# EAGLE board Projeto PCB (EAGLE 9.6.2)
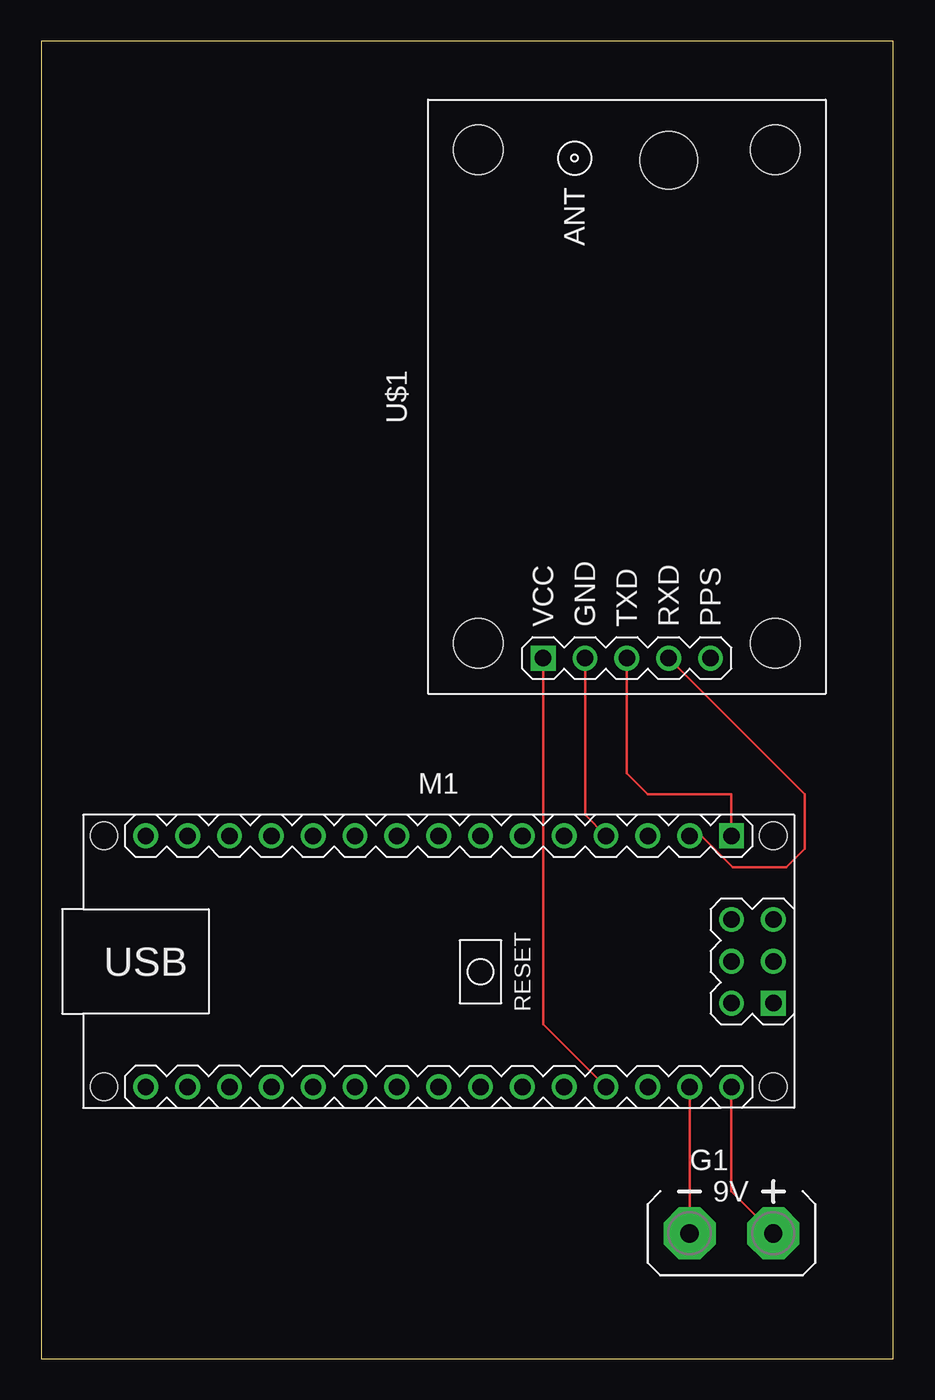
[diagram p0: board, top side]

Size 51.74 x 80 mm. Coordinates in mm from the lower left corner, seen from the top.
Outline: 0,0 51.74,0 51.74,80 0,80 0,0
Copper layers (1*16): Top 0.035mm / dielectric 1.5mm / Bottom 0.035mm
Design rules "default": minimum track width 6mil, minimum drill 0.35mm, track to track 6mil, track to pad 6mil, pad to pad 6mil, via to via 6mil, smd to smd 6mil, copper to edge 40mil, drill to drill 6mil, minimum pad ring 10mil, minimum via ring 8mil, stop-mask expansion 4mil, vias tented up to drill 0mil, thermal gap 10mil

## Footprints (pad centres in the part's own frame; a part is rotated, then mirrored left to right if it is on the bottom)
AB9V = drill 1.118 pad 3.15 octagon: + 0,2.54; - 0,-2.54
ARDUINO-NANO-3.0#ISP = drill 1 square: J1.1 17.78,7.62; J4.1 20.32,-2.54 | drill 1: J1.2 15.24,7.62; J1.3 12.7,7.62; J1.4 10.16,7.62; J1.5 7.62,7.62; J1.6 5.08,7.62; J1.7 2.54,7.62; J1.8 0,7.62; J1.9 -2.54,7.62; J1.10 -5.08,7.62; J1.11 -7.62,7.62; J1.12 -10.16,7.62; J1.13 -12.7,7.62; J1.14 -15.24,7.62; J1.15 -17.78,7.62; J2.1 17.78,-7.62; J2.2 15.24,-7.62; J2.3 12.7,-7.62; J2.4 10.16,-7.62; J2.5 7.62,-7.62; J2.6 5.08,-7.62; J2.7 2.54,-7.62; J2.8 0,-7.62; J2.9 -2.54,-7.62; J2.10 -5.08,-7.62; J2.11 -7.62,-7.62; J2.12 -10.16,-7.62; J2.13 -12.7,-7.62; J2.14 -15.24,-7.62; J2.15 -17.78,-7.62; J4.2 17.78,-2.54; J4.3 20.32,0; J4.4 17.78,0; J4.5 20.32,2.54; J4.6 17.78,2.54 | hole 1.651: -20.32,7.62; -20.32,-7.62; 20.32,-7.62; 20.32,7.62
GPS-RECEIVER-NEO6M = drill 1 square: 1 -15.875,5.08 | drill 1: 2 -15.875,2.54; 3 -15.875,0; 4 -15.875,-2.54; 5 -15.875,-5.08 | hole 3: -14.986,9.017; -14.986,-9.017; 14.986,-9.017; 14.986,9.017 | hole 3.5: 14.351,-2.54

## Placement (x,y rotation side)
G1  AB9V  [AB9V]  41.91,7.62 270 top
M1  ARDUINO-NANO-3.0#ISP  [ARDUINO-NANO-3.0#ISP]  24.13,24.13 0 top
U$1  GPS-RECEIVER-NEO6M  [GPS-RECEIVER-NEO6M]  35.56,58.42 90 top

## Library data of the parts
G1 = battery
M1 U$1 = diy-modules

## Nets
3V3: M1.J2.14
N$1: G1.+ M1.J2.1
N$2: G1.- M1.J2.2
N$3: M1.J2.4 U$1.1
N$4: M1.J1.4 U$1.2
N$5: M1.J1.1 U$1.3
N$6: M1.J1.2 U$1.4
PPS: U$1.5

## Tracks (layer width: path | path; a pad name or v marks a point on that pad's centre or on a via)
N$1
  Top 0.152: M1.J2.1 41.91,10.16 G1.+
N$2
  Top 0.152: M1.J2.2 G1.-
N$3
  Top 0.152: U$1.1 30.48,20.32 M1.J2.4
N$4
  Top 0.152: U$1.2 33.02,33.02 M1.J1.4
N$5
  Top 0.152: U$1.3 35.56,35.56 36.83,34.29 41.91,34.29 M1.J1.1
N$6
  Top 0.152: M1.J1.2 40.08,31.75 42,29.83 45.24,29.83 46.37,30.96 46.37,34.28 U$1.4